# Altium PCB bruh.PcbDoc
Units mil, origin at the board's own origin, x right, y up, seen from the top; angles counter-clockwise.
Board outline 1870 x 2310 mil, 2 copper layers (Top Layer, Bottom Layer); 52 components, 49 nets, 251 pads, 36 vias.
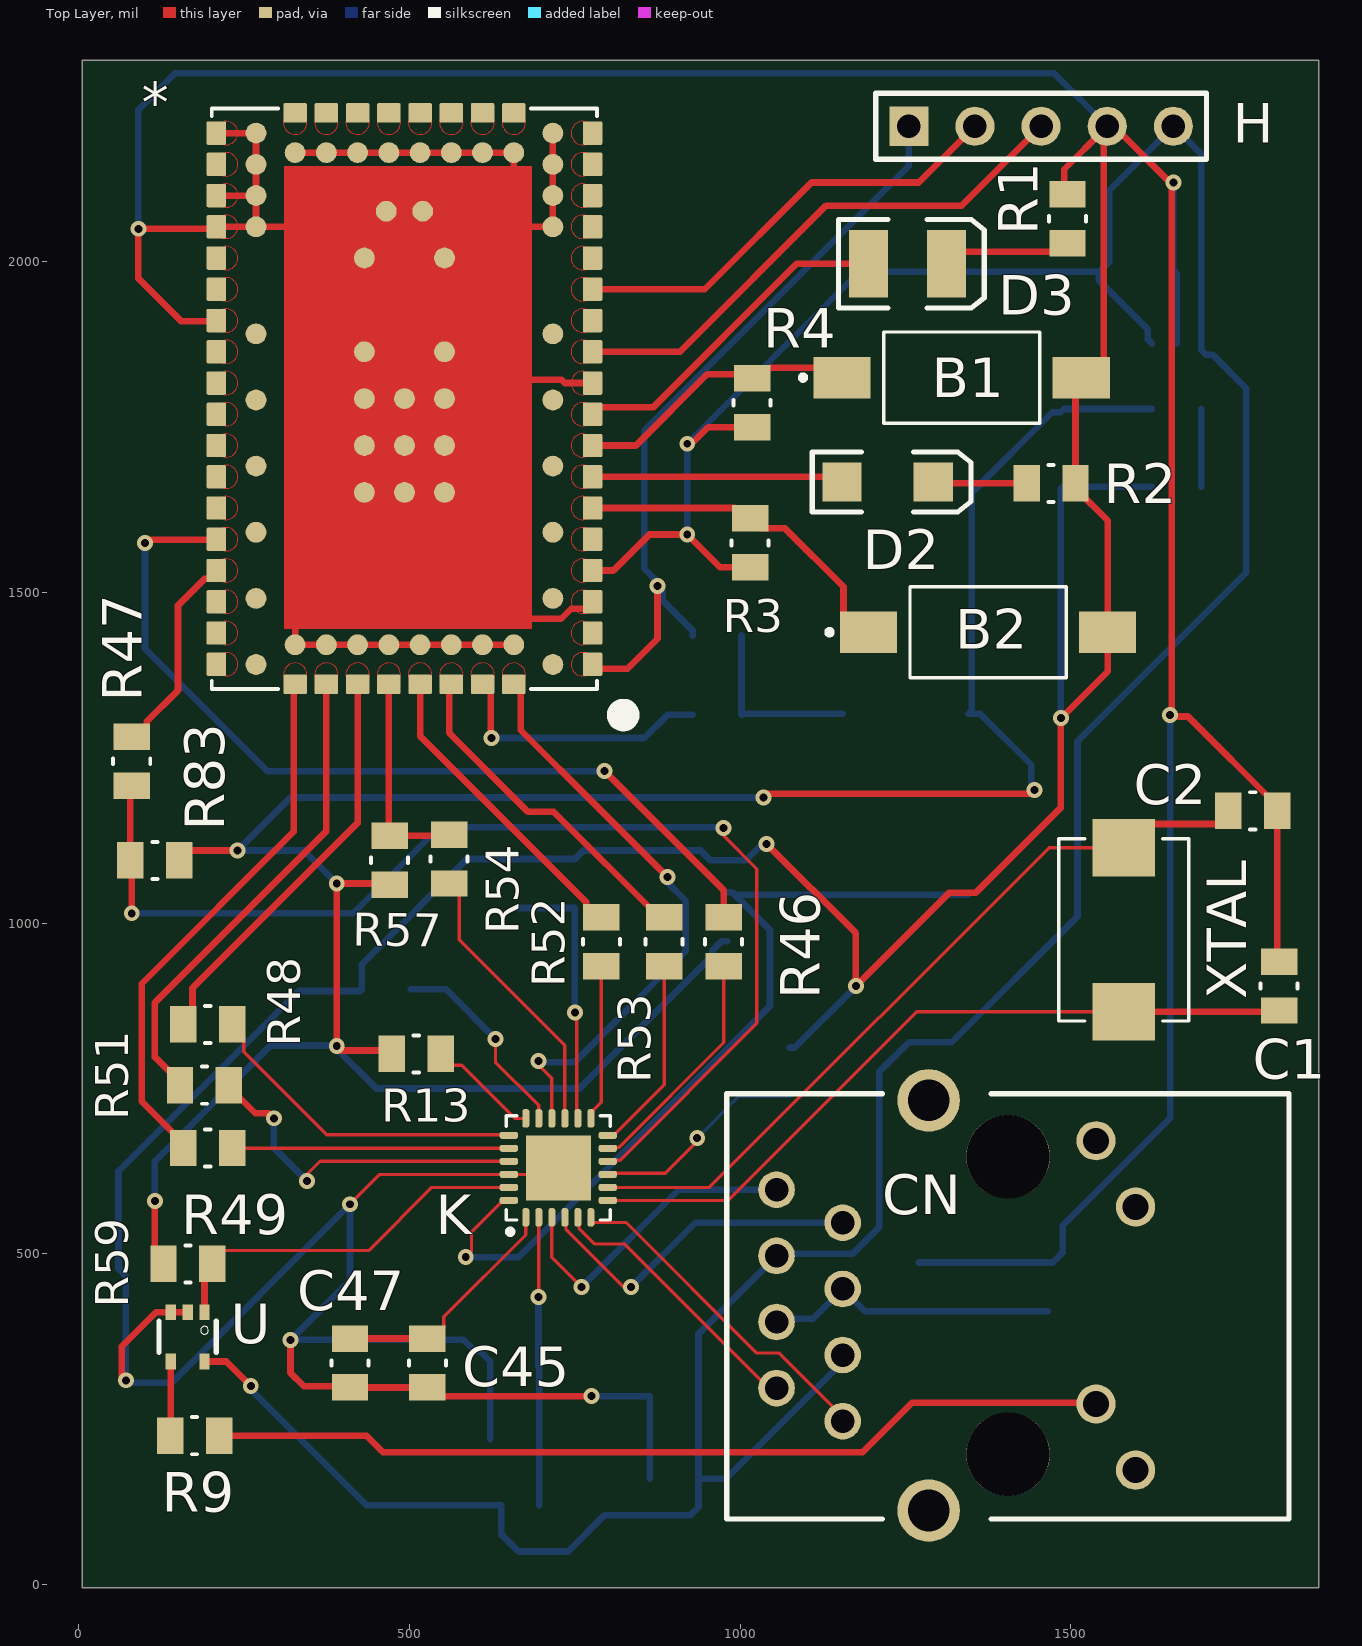
[diagram p0: Top Layer view]
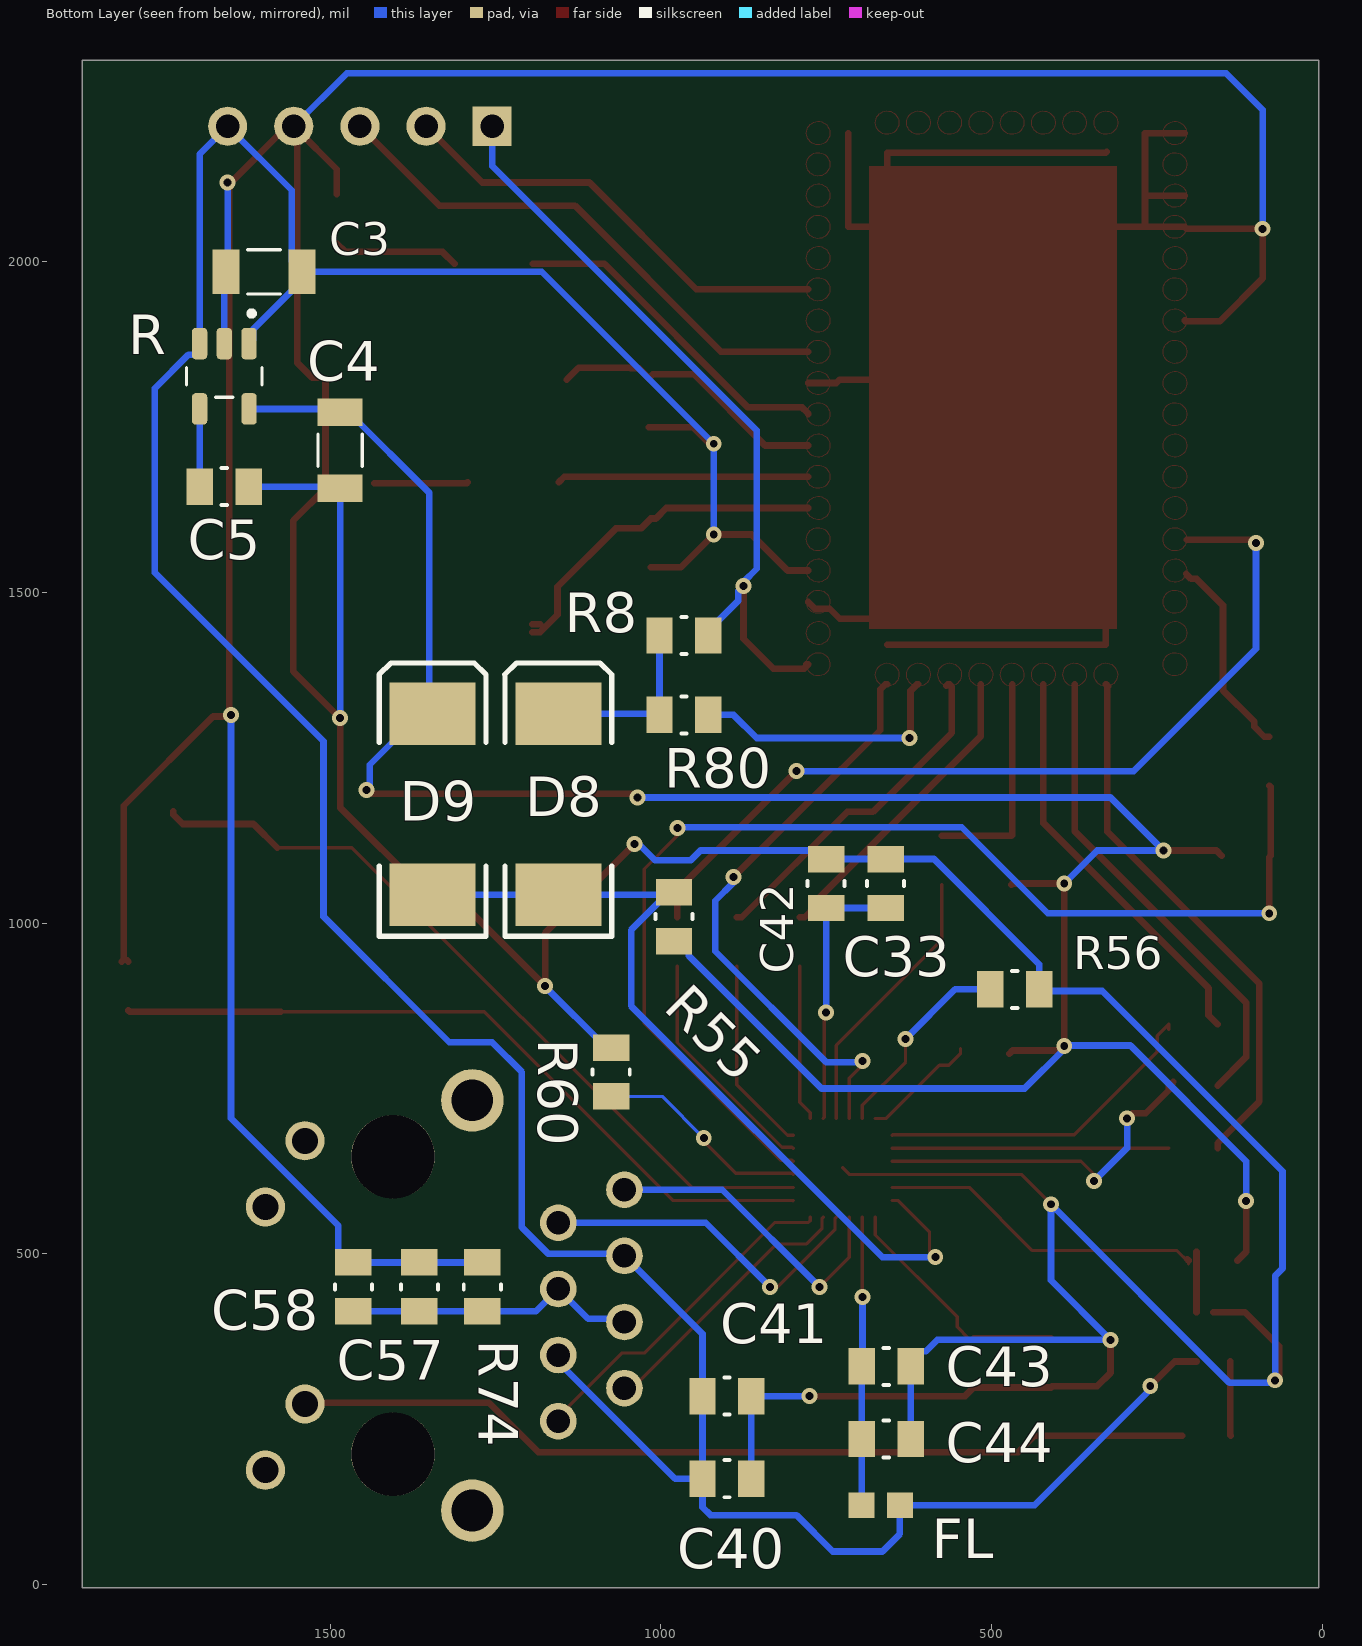
[diagram p1: Bottom Layer view, seen from below]

## Layer stack, top to bottom
Top Solder: solder mask 0.4, Solder Resist, Dk 3.5
Top Layer: signal copper 1.4
Dielectric 1: dielectric 12.6, FR-4, Dk 4.8
Bottom Layer: signal copper 1.4
Bottom Solder: solder mask 0.4, Solder Resist, Dk 3.5

## Board outline
5,2305 5,-5 1875,-5 1875,2305

## Design rules (kind name [scope] priority, off if disabled: settings)
Clearance [All] p1: gap=5 ignorepadtopadclearanceinfootprint=FALSE // Default=10mil
HoleSize [All] p1: absolutevalues=TRUE maxlimit=150 minlimit=1 maxpercent=80.000 minpercent=20.000 // MaximumDefault=100mil
MinimumSolderMaskSliver [All] p1: minsoldermaskwidth=1 // Default=10mil
PolygonConnect [All] p1: connectstyle=Relief reliefconductorwidth=10 reliefentries=4 polygonreliefangle="90 Angle" airgapwidth=10
RoutingVias [All] p1: holewidth=28 width=50 viastyle="Through Hole" minholewidth=28 minwidth=50 maxholewidth=28 maxwidth=50
SilkToSolderMaskClearance [IsPad] p1: minsilkscreentomaskgap=4 clearancetoexposedcopper=TRUE // Default=10mil
SolderMaskExpansion [All] p1: expansion=4 istentingtop=FALSE
Width [All] p1: maxlimit=10 minlimit=5 preferedwidth=10 minimp=50.000000 maximp=50.000000 favimp=50.000000 // MinWidthDefault=10mil
27 further rules are at their usual default settings.

## Classes and differential pairs
component class Ublox_breakout: * B1 B2 C1 C3 C4 C5 C33 C40 C42 C43 C44 C45 C47 C57 C58 CN D2 D3 D8 D9 FL H K R1 R2 R3 R4 R8 R9 R13 R46 R47 R48 R49 R51 R52 R53 R54 R55 R56 R57 R59 R60 R74 R80 R83 U XTAL

## Components (designator, comment, footprint, x,y, rotation, side; value= is the part's Value field where it differs from the comment)
* "ODIN-W262" ODIN-W262 492.37,1793.13 r90 top
B1 "push button" TECO-FSMSM 1335,1825 r0 top
B2 "push button" TECO-FSMSM 1375,1440 r0 top
C1 "22uF 10V" 0805 1815,905 r90 top value=22uF
C2 "22uF 10V" 0805 1775,1170 r0 top value=22uF
C3 "10UF 25V" 1206 1600,1985 r0 bottom value=10uF
C4 "10UF 25V" 1206 1485,1715 r270 bottom value=10uF
C5 "10nF 50V" 0805 1660,1660 r180 bottom value=10nF
C33 "2.2uF 16V" 0805 660,1060 r270 bottom value=2.2uF
C40 "100nF 50V" 0805 900,160 r0 bottom value=100nF
C41 "100nF 50V" 0805 900,285 r0 bottom value=100nF
C42 "100nF 50V" 0805 750,1060 r270 bottom value=100nF
C43 "2.2uF 16V" 0805 659,330 r0 bottom value=2.2uF
C44 "100nF 50V" 0805 659,220 r0 bottom value=100nF
C45 "100nF 50V" 0805 527,335 r90 top value=100nF
C47 "100nF 50V" 0805 410,335 r90 top value=100nF
C57 "100nF 50V" 0805 1365,450 r90 bottom value=100nF
C58 "100nF 50V" 0805 1465,450 r90 bottom value=100nF
CN "RJ45" *RJ45_PULSEJACK 1405,422 r270 top
D2 "LED2" 3.2X1.6X1.1 1223,1667 r0 top
D3 "LED3" 3.5X2.8X1.9 1253,1997 r0 top
D8 "Diode" SMC 1155,1180 r90 bottom
D9 "Diode" SMC 1345,1180 r90 bottom
FL "BLM18PG300SN1D" BEADC1608X95N 667.38,120 r0 bottom
H "Header 5" HDR1X5 1255,2205 r0 top
K "KSZ8081RNAIA-TR" QFN50P400X400X90-25N 725,630 r90 top
R "LP2992IM5-1.8" SOT95P280X145-5N 1660,1827 r270 bottom
R1 "270" 0805 1495,2065 r270 top
R2 "270" 0805 1470,1665 r180 top
R3 "1k" 0805 1015,1575 r270 top
R4 "1k" 0805 1018,1787 r270 top
R8 "JUMPER" 0805 965,1315 r180 bottom value=0
R9 "120" 0805 175,225 r180 top
R13 "1k" 0805 510,802.5 r180 top
R46 "10.0" 0805 975,972 r90 top
R47 "10.0" 0805 80,1245 r90 top
R48 "10.0" 0805 195,847 r0 top
R49 "10.0" 0805 195,660 r0 top
R51 "10.0" 0805 190,755 r0 top
R52 "10.0" 0805 790,972 r90 top
R53 "10.0" 0805 885,972 r90 top
R54 "10.0" 0805 560,1097 r90 top
R55 "1k" 0805 980,1010 r270 bottom
R56 "1k" 0805 465,900 r180 bottom
R57 "1k" 0805 470,1095 r90 top
R59 "1k" 0805 165,485 r0 top
R60 "6.8k" 0805 1075,775 r270 bottom
R74 "16m" 0805 1270,450 r270 bottom
R80 "JUMPER" 0805 965,1435 r180 bottom value=0
R83 "4.7k" 0805 115,1095 r180 top
U "NC7SZ125" SC70-5 164.41,374.6 r180 top
XTAL "CRYSTAL 25.0000MHZ 8PF SMD" SMD-2 1580,990 r270 top

## Footprints (in the part's own frame and the unit in brackets; to place one, negate y for a bottom-side part, rotate by r counter-clockwise, add the part's x,y. Pads: shape width x height; smd on the part's side, far side on the other; paste and mask are expansions set on the pad)
3.2X1.6X1.1 [mm]
  rect 1.5x1.5 smd: 1(-1.75,0) 2(1.75,0)
  silkscreen extent -2.9,-1.15 3.2,1.15
3.5X2.8X1.9 [mm] "SM LED; 2 C-Bend Leads; Body 3.5 x 2.8 x 1.9 mm, inc leads (LxWxH typ)"
  rect 1.5x2.6 smd: 1(-1.5,0) 2(1.5,0)
  silkscreen extent -2.65,-1.7 2.95,1.7
0805 [mil]
  rect 40x55 smd: 1(-37,0) 2(37,0)
  silkscreen extent -4,-28 4,28
1206 [mm]
  rect 1.05x1.72 smd: 1(-1.46,0) 2(1.46,0)
  silkscreen extent -0.62,-0.85 0.62,0.85
*RJ45_PULSEJACK [mm]
  round 1.408 hole 0.9: 1(4.445,-6.35) 2(3.175,-8.89) 3(1.905,-6.35) 4(0.635,-8.89) 5(-0.635,-6.35) 6(-1.905,-8.89) 7(-3.175,-6.35) 8(-4.445,-8.89)
  round 1.508 hole 1: 9(6.325,4.9) 10(3.785,3.38) 11(-3.785,4.9) 12(-6.325,3.38)
  round 3.2 hole 3.2 unplated: None(-5.715,0) None(5.715,0)
  round 2.4 hole 1.6: P$5(-7.875,-3.05) P$6(7.875,-3.05)
  silkscreen extent -8.13,-10.8 8.2,10.79
BEADC1608X95N [mm]
  rect 1x0.97 smd: 1(-0.735,0) 2(0.735,0)
HDR1X5 [mm] "Connector; Header; 5 Position"
  rect 1.5x1.5 hole 0.9: 1(0,0)
  round 1.5 hole 0.9: 2(2.54,0) 3(5.08,0) 4(7.62,0) 5(10.16,0)
  silkscreen extent -1.27,-1.27 11.43,1.27
ODIN-W262 [mm]
  round 0.8 smd: 1(6.6,-5.7) 2(7.8,-5.7) 3(9,-5.7) 4(10.2,-5.7) 5(9.45,-4.2) 6(9.45,-3) 7(9.45,-1.8) 8(9.45,-0.6) 9(9.45,0.6) 10(9.45,1.8) 11(9.45,3) 12(9.45,4.2) 13(10.2,5.7) 14(9,5.7) 15(7.8,5.7) 16(6.6,5.7) 17(-9.45,4.2) 18(-9.45,3) 19(-9.45,1.8) 20(-9.45,0.6) 21(-9.45,-0.6) 22(-9.45,-1.8) 23(-9.45,-3) 24(-9.45,-4.2) 25(-3.6,-1.54) 26(-1.8,-1.54) 27(0,-1.54) 28(1.8,-1.54) 29(5.4,-1.54) 30(7.2,-0.7) 31(-3.6,0) 32(-1.8,0) 33(0,0) 34(-3.6,1.54) 35(-1.8,1.54) 36(0,1.54) 37(1.8,1.54) 38(5.4,1.54) 39(7.2,0.7) TP1(2.49,-5.7) TP2(2.49,5.7) TP3(-0.05,-5.7) TP4(-0.05,5.7) TP5(-2.59,-5.7) TP6(-2.59,5.7) TP7(-5.13,-5.7) TP8(-5.13,5.7) TP9(-7.67,-5.7) TP10(-7.67,5.7) TP11(-10.21,-5.7) TP12(-10.21,5.7)
  rrect15% 0.9x0.75 smd paste-1 mask+0: A1(-10.2,-7.225) A2(-9,-7.225) A3(-7.8,-7.225) A4(-6.6,-7.225) A5(-5.4,-7.225) A6(-4.2,-7.225) A7(-3,-7.225) A8(-1.8,-7.225) A9(-0.6,-7.225) A10(0.6,-7.225) A11(1.8,-7.225) A12(3,-7.225) A13(4.2,-7.225) A14(5.4,-7.225) A15(6.6,-7.225) A16(7.8,-7.225) A17(9,-7.225) A18(10.2,-7.225) C1(10.2,7.225) C2(9,7.225) C3(7.8,7.225) C4(6.6,7.225) C5(5.4,7.225) C6(4.2,7.225) C7(3,7.225) C8(1.8,7.225) C9(0.6,7.225) C10(-0.6,7.225) C11(-1.8,7.225) C12(-3,7.225) C13(-4.2,7.225) C14(-5.4,7.225) C15(-6.6,7.225) C16(-7.8,7.225) C17(-9,7.225) C18(-10.2,7.225)
  rrect15% 0.75x0.9 smd paste-1 mask+0: B1(10.975,-4.2) B2(10.975,-3) B3(10.975,-1.8) B4(10.975,-0.6) B5(10.975,0.6) B6(10.975,1.8) B7(10.975,3) B8(10.975,4.2) D1(-10.975,4.2) D2(-10.975,3) D3(-10.975,1.8) D4(-10.975,0.6) D5(-10.975,-0.6) D6(-10.975,-1.8) D7(-10.975,-3) D8(-10.975,-4.2)
  Top Layer circle w0: c-6.6,-6.85 r0.45
  Top Layer circle w0: c10.2,6.85 r0.45
  Top Layer circle w0: c7.8,6.85 r0.45
  Top Layer circle w0: c3,-6.85 r0.45
  Top Layer circle w0: c5.4,-6.85 r0.45
  Top Layer circle w0: c6.6,-6.85 r0.45
  Top Layer circle w0: c7.8,-6.85 r0.45
  Top Layer circle w0: c9,-6.85 r0.45
  Top Layer circle w0: c10.2,-6.85 r0.45
  Top Layer circle w0: c-9,-6.85 r0.45
  Top Layer circle w0: c-5.4,-6.85 r0.45
  Top Layer circle w0: c1.8,6.85 r0.45
  Top Layer circle w0: c0.6,6.85 r0.45
  Top Layer circle w0: c-0.6,6.85 r0.45
  Top Layer circle w0: c-1.8,6.85 r0.45
  Top Layer circle w0: c-3,6.85 r0.45
  Top Layer circle w0: c-4.2,6.85 r0.45
  Top Layer circle w0: c-7.8,6.85 r0.45
  Top Layer circle w0: c-9,6.85 r0.45
  Top Layer circle w0: c-10.2,6.85 r0.45
  Top Layer circle w0: c9,6.85 r0.45
  Top Layer circle w0: c5.4,6.85 r0.45
  Top Layer circle w0: c4.2,6.85 r0.45
  Top Layer circle w0: c10.6,-4.2 r0.45
  Top Layer circle w0: c10.6,-3 r0.45
  Top Layer circle w0: c10.6,-1.8 r0.45
  Top Layer circle w0: c10.6,-0.6 r0.45
  Top Layer circle w0: c10.6,0.6 r0.45
  Top Layer circle w0: c10.6,1.8 r0.45
  Top Layer circle w0: c10.6,3 r0.45
  Top Layer circle w0: c10.6,4.2 r0.45
  Top Layer circle w0: c-3,-6.85 r0.45
  Top Layer circle w0: c-4.2,-6.85 r0.45
  Top Layer circle w0: c-1.8,-6.85 r0.45
  Top Layer circle w0: c4.2,-6.85 r0.45
  Top Layer circle w0: c1.8,-6.85 r0.45
  Top Layer lines w0: -5.414,7.3 ccw(c-5.4,6.85) -5.667,6.488 ccw(c-5.4,6.85) -5.4,6.4 ccw(c-5.4,6.85) -5.414,7.3 ; 2.968,7.299 cw(c3,6.85) 3,6.4 cw(c3,6.85) 2.968,7.299 ; 6.53,7.295 cw(c6.6,6.85) 6.6,6.4 cw(c6.6,6.85) 6.53,7.295 ; -6.731,7.281 cw(c-6.6,6.85) -6.6,6.4 cw(c-6.6,6.85) -6.731,7.281 ; -11.042,4.286 cw(c-10.6,4.2) -10.6,3.75 cw(c-10.6,4.2) -11.042,4.286 ; -11.05,3 ccw(c-10.6,3) -10.6,2.55 ccw(c-10.6,3) -11.05,3 ; -11.05,1.8 cw(c-10.6,1.8) -10.6,1.35 cw(c-10.6,1.8) -11.05,1.8 ; -11.05,0.6 ccw(c-10.6,0.6) -10.6,0.15 ccw(c-10.6,0.6) -11.05,0.6 ; -11.05,-0.6 cw(c-10.6,-0.6) -10.6,-1.05 cw(c-10.6,-0.6) -11.05,-0.6 ; -11.031,-1.931 cw(c-10.6,-1.8) -10.6,-2.25 cw(c-10.6,-1.8) -11.031,-1.931 ; -11.042,-3.086 cw(c-10.6,-3) -10.6,-3.45 cw(c-10.6,-3) -11.042,-3.086 ; -11.031,-4.331 cw(c-10.6,-4.2) -10.6,-4.65 cw(c-10.6,-4.2) -11.031,-4.331 ; 0.6,-6.4 cw(c0.6,-6.85) 0.6,-7.3 cw(c0.6,-6.85) 0.6,-6.4 ; -8.067,-6.488 cw(c-7.8,-6.85) -7.8,-7.3 cw(c-7.8,-6.85) -8.067,-6.488 ; -10.069,-7.281 cw(c-10.2,-6.85) -10.114,-7.292 cw(c-10.2,-6.85) -10.2,-7.3 cw(c-10.2,-6.85) -10.069,-7.281 ; -0.514,-7.292 cw(c-0.6,-6.85) -0.6,-7.3 cw(c-0.6,-6.85) -0.514,-7.292
  silkscreen extent -12.4,-8.65 11.15,7.4, body extent -11.15,-7.4 11.15,7.4, height 4.8
QFN50P400X400X90-25N [mm]
  rrect70% 0.71x0.27 smd: 1(-1.9,1.25) 2(-1.9,0.75) 3(-1.9,0.25) 4(-1.9,-0.25) 5(-1.9,-0.75) 6(-1.9,-1.25) 13(1.9,-1.25) 14(1.9,-0.75) 15(1.9,-0.25) 16(1.9,0.25) 17(1.9,0.75) 18(1.9,1.25)
  rrect70% 0.27x0.71 smd: 7(-1.25,-1.9) 8(-0.75,-1.9) 9(-0.25,-1.9) 10(0.25,-1.9) 11(0.75,-1.9) 12(1.25,-1.9) 19(1.25,1.9) 20(0.75,1.9) 21(0.25,1.9) 22(-0.25,1.9) 23(-0.75,1.9) 24(-1.25,1.9)
  rect 2.5x2.5 smd paste-2: 25(0,0)
  silkscreen extent -2.55,-2 2,2
SC70-5 [mm]
  rect 0.4x0.6 smd: 1(-0.65,-0.95) 2(0,-0.95) 3(0.65,-0.95) 4(0.65,0.95) 5(-0.65,0.95)
  silkscreen extent -1.1,-0.6 1.1,0.6
SMC [mm] "DO-214-AB/SMC; 2 C-Bend Leads; Body 7.9 x 5.9 mm, inc. leads (LxW)"
  rect 2.4x3.3 smd: 1(-3.475,0) 2(3.475,0)
  silkscreen extent -5.07,-2.05 5.43,2.05
SMD-2 [mm]
  rect 2.2x2.4 smd: 1(-3.15,0) 2(3.15,0)
  silkscreen extent -3.5,-2.5 3.5,2.5
SOT95P280X145-5N [mm]
  rrect50% 1.21x0.59 smd: 1(-1.255,0.95) 2(-1.255,0) 3(-1.255,-0.95) 4(1.255,-0.95) 5(1.255,0.95)
  silkscreen extent -2.51,-1.45 0.8,1.45
TECO-FSMSM [mm]
  rect 2.19x1.6 smd: 1(-4.59,0) 2(4.59,0)
  silkscreen extent -6.2,-1.75 3,1.75

## Part data
B1 B2: library part Teco-FSMSM
C1 C2: library part "CAP 22uF 10V", "CAP CER 2.2UF 10V X5R 0805", Operating Temperature="-55°C ~ 85°C", Package=0805, Rating=10V, Temperature Coefficient=X5R, Tolerance=20%
C3 C4: library part "CAP 10uF 25V", "CAP CER 10UF 25V X5R 1206", Operating Temperature="-55°C ~ 85°C", Package=1206, Rating=25V, Temperature Coefficient=X5R, Tolerance=10%
C5: library part "CAP 10nF 50V", "CAP CER 10000PF 50V X7R 0805", Operating Temperature="-55°C ~ 125°C", Package=0805, Rating=50V, Temperature Coefficient=X7R, Tolerance=10%
C33 C43: library part "CAP 2.2uF 16V", "CAP CER 2.2UF 16V X7R 0805", Operating Temperature="-55°C ~ 125°C", Package=0805, Rating=16V, Temperature Coefficient=X7R, Tolerance=10%
C40 C41 C42 C44 C45 C47 C57 C58: library part "CAP 100nF 50V", "CAP CER 0.1UF 50V X7R 0805", Package=0805, Rating=50V, Tolerance=10%
CN: "Jack Modular Connector 8p8c (RJ45, Ethernet) 90Â° Angle (Right) Unshielded", Package=None, Availability=Unavailable, Check_prices=https://www.snapeda.com/parts/RJ45/Bulgin/view-part/55901/?ref=eda, MF=Bulgin, MP=RJ45, Price=None, SnapEDA_Link=https://www.snapeda.com/parts/RJ45/Bulgin/view-part/55901/?ref=snap
D2: library part "LED RED SMD", "Typical RED, GREEN, YELLOW, AMBER GaAs LED", Color=Red, Current - Test=20mA, Lens Color=Colorless, Package=1206, Voltage - Forward (Vf) (Typ)=1.7V, Lens Transparency=Clear
D3: "Typical BLUE SiC LED", DatasheetVersion=16-Apr-2002, LatestRevisionDate=17-Dec-2003, LatestRevisionNote="PCB Footprint replaced.", PackageDescription="SM LED; 2 C-Bend Leads; Body 3.5 x 2.8 x 1.9 mm, inc leads (LxWxH typ)", PackageReference=3.5X2.8X1.9, PackageVersion=16-Apr-2002, Published=8-Jun-2000, Publisher="Altium Limited"
D8 D9: "Default Diode", Code_JEDEC=DO-214-AB, LatestRevisionDate=17-Jul-2002, LatestRevisionNote="Re-released for DXP Platform.", PackageDescription="DO-214-AB/SMC; 2 C-Bend Leads; Body 7.9 x 5.9 mm, inc. leads (LxW)", PackageReference=SMC, PackageVersion=Sep-1996, Published=8-Jun-2000, Publisher="Altium Limited"
FL: "30 Ohms @ 100MHz 1 Power Line Ferrite Bead 0603 _1608 Metric_ 1A 50mOhm", Package="1608 Murata", Availability=Unavailable, MF=Murata, MP=BLM18PG300SN1D, Price=None, SnapEDA_Link=https://www.snapeda.com/parts/BLM18PG300SN1D/Murata/view-part/270173/?ref=snap
H: "Header, 5-Pin", LatestRevisionDate=17-Jul-2002, LatestRevisionNote="Re-released for DXP Platform.", Publisher="Altium Limited"
K: "1/1 Transceiver Full RMII 24-QFN _4x4_", Package="QFN-24 Microchip", Availability=Unavailable, MF=Microchip, MP=KSZ8081RNAIA-TR, Price=None, SnapEDA_Link=https://www.snapeda.com/parts/KSZ8081RNAIA-TR/Microchip/view-part/482545/?ref=snap
R: Package=None, Availability=Unavailable, MP=LP2992IM5-1.8/NOPB, Price=None
R1 R2: library part "RES 270 1/8W", "RES SMD 270 OHM 5% 1/8W 0805", Package=0805, Power (Watts)=0.125W, Tolerance=5%
R3 R4 R13 R55 R56 R57 R59: library part "RES 1k 1/8W", "RES SMD 1K OHM 5% 1/8W 0805", Package=0805, Power (Watts)=0.125W, Tolerance=5%
R8 R80: library part "RES 0 JUMPER", "RES SMD 0 OHM JUMPER GENERIC 0805", Package=0805
R9: library part "RES 120.0 1/8W", "RES SMD 120 OHM 5% 1/8W 0805", Package=0805, Power (Watts)=0.125W, Tolerance=5%
R46 R47 R48 R49 R51 R52 R53 R54: library part "RES 10.0 1/8W - 5%", "RES SMD 10.0 OHM 5% 1/8W 0805", Package=0805, Power (Watts)=0.125W, Tolerance=5%
R60: library part "RES 6.8k 1/8W", "RES SMD 6.8K OHM 5% 1/8W 0805", Package=0805, Power (Watts)=0.125W, Tolerance=5%
R74: library part "RES 16m 1/2W", "RES SMD 0.016 OHM 1% 1/2W 0805 Thick Film", Case Code (Imperial)=0805, Case Code (Metric)=2012, Manufacturer=Panasonic, Manufacturer Part Number=ERJ-6BWFR016V, Max Operating Temperature=155°C, Max Power Dissipation=500mW, Min Operating Temperature=-55°C, Package Quantity=1, Resistance=16mR, Supplier Part Number 1=P.016AQCT-ND, Temperature Coefficient=200ppm/°C, Tolerance=1%, Case/Package=0805, Category="Chip SMD Resistors", ComponentLink1Description=https://datasheet.ciiva.com/11808/0900766b8126441d-11808690.pdf?src-supplier=RSComponents, ComponentLink1URL=https://datasheet.ciiva.com/11808/0900766b8126441d-11808690.pdf?src-supplier=RSComponents, ComponentLink2Description=https://datasheet.ciiva.com/2452/aoa0000ce3-2452594.pdf?src-supplier=Digi-Key, ComponentLink2URL=https://datasheet.ciiva.com/2452/aoa0000ce3-2452594.pdf?src-supplier=Digi-Key, ComponentLink3Description=https://datasheet.ciiva.com/2452/aoa0000ce3-2452592.pdf?src-supplier=Digi-Key, ComponentLink3URL=https://datasheet.ciiva.com/2452/aoa0000ce3-2452592.pdf?src-supplier=Digi-Key, ComponentLink4Description=https://datasheet.ciiva.com/2452/aoa0000ce3-2452593.pdf?src-supplier=Digi-Key, ComponentLink4URL=https://datasheet.ciiva.com/2452/aoa0000ce3-2452593.pdf?src-supplier=Digi-Key, ComponentLink5Description=https://datasheet.ciiva.com/9192/aoa0000ce3-9192761.pdf?src-supplier=Avnet, ComponentLink5URL=https://datasheet.ciiva.com/9192/aoa0000ce3-9192761.pdf?src-supplier=Avnet, ComponentLink6Description=https://datasheet.ciiva.com/17211/aoa0000ce3-17211370.pdf?src-supplier=Avnet+Europe, ComponentLink6URL=https://datasheet.ciiva.com/17211/aoa0000ce3-17211370.pdf?src-supplier=Avnet+Europe, Composition="Thick Film", Contact Plating=Tin, Depth=1.25mm, Features="Automotive AEC-Q200", Height=0.028inch, Lead Free="Lead Free", Length=2mm, Military Standard=Not, Mount="Surface Mount", Number of Pins=2, Number of Terminations=2, Packaging="Tape and Reel", Power Rating=500mW, Pricing 1="1=0.65000, 10=0.53800, 100=0.36140, 1000=0.21148, 2500=0.20917 (USD)", Radiation Hardening=No, RoHS=Yes, Stock 1=4585, Supplier 1=Digi-Key, Termination=SMD/SMT, Width=0.049inch
R83: library part "RES 4.7k 1/8W - 5%", "RES SMD 4.7k OHM 5% 1/8W 0805", Package=0805, Power (Watts)=0.125W, Tolerance=5%
U: "Buffer, Non-Inverting 1 Element 1 Bit per Element 3-State Output SC-70-5", Package="SC-70 ON Semiconductor", Availability=Unavailable, MF="ON Semiconductor", MP=NC7SZ125, Price=None, SnapEDA_Link=https://www.snapeda.com/parts/NC7SZ125/ON%20Semiconductor/view-part/2686816/?ref=snap
XTAL: library part "XTAL 25MHZ 8PF SMD", "25MHz ±50ppm Crystal 8pF 70 Ohms 2-SMD, No Lead", Frequency=25MHz, Load Capacitance=8pF, Package="2-SMD, No Lead", Supplier Part Number 1=644-1041-1-ND, Digikey=644-1041-1-ND, Digikey Link=https://www.digikey.ca/product-detail/en/ndk-america-inc/NX5032GA-25.000000MHZ-LN-CD-1/644-1041-1-ND/1128913, ESR="70 Ohms", MF="NDK America, Inc.", MP=NX5032GA-25.000000MHZ-LN-CD-1, Price="0.95 CAD", Supplier 1=Digi-Key

## Via types
v1: diameter 24, hole 12, Top Layer to Bottom Layer, 36 vias

## Nets (pads, with @x,y where several pads share a name; then routed paths per layer and width w, separated by ;. In a path a pad name is that pad's centre, name@x,y a point inside that pad or via, vN(x,y) a via of type N, cw(c..) or ccw(c..) an arc to the next point about the centre after c; other vN are vias at no path point)
1v8: C4.1 D9.2 R13.2 R55.2 R57.1 R59.1 R83.1 R.5 | length 3966.8
  Top Layer w10: v1(115,580) 115,503 R59.1@128,490 ; R83.1@152,1102 160,1110 v1(240,1110) ; R57.1 468,1060 v1(390,1060) v1(390,814.38) 396.88,807.5 468,807.5 R13.2 ; v1(1035,1190) 1040.62,1195.62 1439.38,1195.62 v1(1445,1201.25)
  Bottom Layer w10: v1(115,580) 115,640 290,815 389.38,815 v1(390,814.38) 390,810 450,750 757,750 957.5,950.5 957.5,958 972.5,973 R55.2 ; v1(390,1060) 340,1110 v1(240,1110) 320,1190 v1(1035,1190) ; v1(1445,1201.25) 1440,1206.25 1440,1239.53 1362.72,1316.81 D9.2 1350,1321.81 1350,1650.67 1471.81,1772.48 C4.1 1490.11,1777.59 R.5
3v3: *.A4 C3.1 C40.2 C41.2 CN.3 CN.6 FL.1 H.5 R3.2 R4.2 R.1 R.3 U.5 | length 5475.1
  Top Layer w10: U.5 222.8,337.2 v1(260,300) ; *.A4 779.77,1533.29 808.29,1533.29 862.78,1587.78 v1(920,1587.78) 969.78,1538 R3.2 ; v1(920,1725) 926.57,1725 951.57,1750 R4.2
  Bottom Layer w10: v1(260,300) 260,295 435,120 FL.1 638.44,76.56 665,50 740,50 795,105 925,105 937,117 C40.2 ; v1(920,1587.78) v1(920,1725) 1180,1985 C3.1 ; CN.3 1155,336.59 978.41,160 C40.2 ; R.1 1616.48,1882.53 1616.48,1897.85 1542.52,1971.81 C3.1 ; C40.2 C41.2 937,379 CN.6 1058,500 1170,500 1210,540 1210,774.77 1255.11,819.89 1319.89,819.89 1510,1010 1510,1275 1765,1530 1765,1808.81 1714.02,1859.79 1703.95,1859.79 1697.4,1866.34 R.3 1697.4,2162.6 H.5 1558.19,2108.19 1558.19,2000.67 C3.1
BlueLED: *.A9 D3.1 | length 511.8
  Top Layer w10: *.A9 776.82,1770.25 779.45,1772.88 786.58,1780.01 868.4,1780.01 1085.39,1997 D3.1
ETH_CRSDV: *.D4 R54.2 R57.2 | length 334.6
  Top Layer w10: *.D4 468.75,1358.09 468.75,1133.25 R57.2 R54.2@575,1132
ETH_MC: K.10 R47.1 R83.2 | length 1771.8
  Top Layer w5: K.10 801.67,641.71 818.31,641.71 1025,848.41 1025,1081.97 975,1131.97 v1(975,1143.91)
  Top Layer w10: v1(80,1015) 80,1100 78,1102 78,1206 R47.1
  Bottom Layer w10: v1(80,1015) 415,1015 545,1145 973.91,1145 v1(975,1143.91)
ETH_MDIO: K.11 R46.1 | length 356.9
  Top Layer w5: K.11 801.67,661.4 816.78,661.4 975,819.62 R46.1
ETH_REFCLK: *.D8 K.16 | length 900.6
  Top Layer w5: v1(695,791.53) 695,785.88 715.16,765.73 K.16
  Top Layer w10: *.D8 660.68,1361.05 662.87,1358.86 668.23,1353.5 668.23,1291.77 782.79,1177.21 v1(890,1070)
  Bottom Layer w10: v1(695,791.53) 696.53,790 750,790 917.63,957.63 917.63,1033.99 890,1061.62 v1(890,1070)
ETH_RXD0: *.D5 R52.2 | length 469.9
  Top Layer w10: *.D5 515.99,1358.09 515.99,1283.01 767.5,1031.5 767.5,1024 782.5,1009 R52.2
ETH_RXD1: *.D6 R53.2 | length 521.1
  Top Layer w10: *.D6@568.38,1358.86 566.19,1361.05 *.D6 560,1357.81 560,1287.76 679.38,1168.38 718.12,1168.38 877.5,1009 R53.2
ETH_TXD0: *.D1 R49.1 | length 827.7
  Top Layer w10: R49.1 158,667.5 95,730.5 95,908.43 325,1138.43 325,1359.03 *.D1 326.28,1361.05 *.D1@323.65,1358.42
ETH_TXD1: *.D2 R51.1 | length 731.7
  Top Layer w10: R51.1@158,754.5 115,797.5 115,880 374.26,1139.26 374.26,1358.09 *.D2
ETH_TXEN: *.D3 R48.1 | length 623.2
  Top Layer w10: R48.1 171.86,860.86 171.86,901.86 421.5,1151.5 421.5,1358.09 *.D3
GND: *.1 *.2 *.3 *.4 *.5 *.6 *.7 *.8 *.9 *.10 *.11 *.12 *.13 *.14 *.15 *.16 *.17 *.18 *.19 *.20 *.21 *.22 *.23 *.24 *.25 *.26 *.27 *.28 *.29 *.30 *.31 *.32 *.33 *.34 *.35 *.36 *.37 *.38 *.39 *.A3 *.A10 *.C1 *.C3 *.C4 *.C7 B1.2 B2.2 C1.2 C2.2 C3.2 C4.2 C5.2 C33.1 C40.1 C41.1 C42.1 C43.1 C44.1 C45.1 C47.1 C57.2 C58.2 H.4 K.22 K.25 R1.1 R2.1 R56.2 R60.1 R74.1 R.2 U.2 U.3 | length 13102.3
  Top Layer w5: v1(410,575) 455.16,620.16 K.22 715.16,620.16 K.25
  Top Layer w10: v1(71.17,308.83) 65,315 65,360 117,412 U.3 U.2 ; *.C7 206.68,1910 205.01,1910 155,1910 90,1975 v1(90,2050) 204.94,2050 205.18,2050.24 *.C4 240.4,2052.98 *.16 ; *.C3 240.4,2100.22 *.15 ; *.C1 240.4,2194.71 *.13 *.14 *.15 ; v1(320,370) 320,320 340,300 408,300 C47.1 C45.1 540,285 v1(775,285) ; 325,1460 327.02,1457.98 *.17 *.18 *.19 *.20 *.21 *.22 *.23 *.24 ; *.12@325.8,2166.4 *.12 *.11 *.10 *.9 *.8 *.7 *.6 *.5 657.72,2050 ; 330,2055 327.98,2052.98 *.16 ; 670,1455 675.42,1460.42 729.52,1460.42 744.64,1475.55 747.79,1475.55 767.06,1475.55 776.82,1485.31 *.A3 ; *.4 *.3 *.2 *.1 660.7,2052.98 657.72,2050 ; *.A10 744.34,1816.76 734.67,1816.76 729.52,1821.91 680,1821.91 675,1826.91 675,1835 657.72,1852.28 657.72,2050 ; v1(1040,1120) 1175,985 v1(1175,905) 1316.33,1046.33 1356.33,1046.33 1485,1175 v1(1485,1310) 1555.71,1380.71 B2.2 1555.71,1608.79 1507,1657.5 R2.1 B1.2@1507,1818.71 ; R1.1@1490,2102 1490,2140 H.4@1550,2200 ; B1.2 1527.32,1825 1550,1847.68 H.4@1550,2200 ; C1.2@1805,942 C1.2@1807,944 ; C1.2 1812,945 C2.2 1812,1177.5 1677,1312.5 1652.5,1312.5 v1(1650,1315) 1652.5,1317.5 1652.5,2117.5 v1(1655,2120) 1650,2120 1565,2205 H.4 H.4@1550,2200 ; *.16 *.15
  Bottom Layer w10: v1(90,2050) 90,2230 145,2285 1475,2285 H.4 ; C44.1 C43.1 622,337.5 607,352.5 599.5,352.5 582,370 v1(320,370) 410,460 v1(410,575) 140,305 75,305 v1(71.17,308.83) 71.17,466.74 60,477.91 60,625 332.5,897.5 425.5,897.5 R56.2 428,938 587,1097 C33.1 C42.1 763,1110 940,1110 955,1095 1008.43,1095 1033.43,1120 v1(1040,1120) ; v1(775,285) C41.1 C40.1 ; R60.1 1082.5,812 1175,904.5 v1(1175,905) ; R74.1 C57.2 C58.2 1472.5,487 1487.5,502 1487.5,542.5 1650,705 v1(1650,1315) ; v1(1485,1310) C4.2 1487.48,1660 C5.2 ; v1(1655,2120) 1655,1987.48 C3.2 1660,1982.48 R.2
INV_TO_RJ45: CN.10 R9.1 | length 1368.3
  Top Layer w10: R9.1 435,225 460,200 1185,200 1259.99,274.99 1536.06,274.99 CN.10
KSZ_RST_OUT: D8.1 D9.1 K.24 R55.1 | length 1292.3
  Top Layer w5: v1(585,495) 593.61,503.61 593.61,532.86 641.54,580.79 K.24
  Bottom Layer w10: v1(585,495) 665,495 1045,875 1045,989.5 R55.1@991.31,1043.19 ; R55.1 987.5,1047 R55.1@991.31,1043.19 ; D9.1 D8.1 R55.1@991.31,1043.19
MAIN_RESET: *.A1 H.1 R80.2 | length 1168.4
  Top Layer w10: *.A1@779.77,1391.56 *.A1 783.38,1385 830,1385 875,1430 v1(875,1510)
  Bottom Layer w10: R80.2 928,1442.5 882.65,1487.85 882.65,1502.35 v1(875,1510) 875,1515.86 855,1535.86 855,1745 1255,2145 H.1
Net*_D7: *.D7 R8.2 | length 406.3
  Top Layer w10: *.D7 612.79,1361.05 622.56,1351.28 622.56,1281.78 v1(624.13,1280.2)
  Bottom Layer w10: v1(624.13,1280.2) 624.33,1280 855,1280 890,1315 R8.2
NetC5_1: C5.1 R.4 | length 117.8
  Bottom Layer w10: C5.1 1697.4,1660.4 R.4
NetC33_2: C33.2 C42.2 K.14 | length 410.1
  Top Layer w5: v1(750,865) 752.66,862.34 752.66,706.67 K.14
  Bottom Layer w10: C33.2 C42.2 v1(750,865)
NetD2_2: D2.2 R2.2 | length 141.9
  Top Layer w10: D2.2 1293.9,1665 R2.2
NetD3_2: D3.2 R1.2 | length 190.8
  Top Layer w10: D3.2 1330.06,2015 1477,2015 R1.2@1490,2028
NetD8_2: D8.2 R8.1 R80.1 | length 273.8
  Bottom Layer w10: R80.1 R8.1 1003.81,1316.81 D8.2
NetK_9: K.9 R60.2 | length 326.9
  Top Layer w5: K.9 801.67,622.03 887.03,622.03 935,670 v1(935,675)
  Bottom Layer w5: v1(935,675) 998,738 R60.2
NetK_12: K.12 R53.1 | length 296.2
  Top Layer w5: K.12 808.46,679.21 885,755.75 R53.1
NetK_13: K.13 R52.1 | length 236.7
  Top Layer w5: K.13 774.21,713.46 790,729.25 R52.1
NetK_15: K.15 R54.1 | length 419.4
  Top Layer w5: R54.1@575,1058 575,975 734.84,815.16 K.15
NetK_17: K.17 R56.1 | length 306.4
  Top Layer w5: v1(630,825) 630,790 695.47,724.53 K.17
  Bottom Layer w10: R56.1 555,900 v1(630,825)
NetK_18: K.18 R13.1 | length 176.8
  Top Layer w5: R13.1@547,810 R13.1 564.5,785 578.68,785 658.88,704.8 K.18
NetK_19: K.19 R48.2 | length 509.3
  Top Layer w5: R48.2@232,839.5 R48.2 249.5,829.5 249.5,805.5 375,680 649.41,680 K.19
NetK_20: K.20 R49.2 | length 418.4
  Top Layer w5: R49.2 232.47,659.53 K.20
NetK_21: K.21 R51.2 | length 535.2
  Top Layer w5: v1(345,610) 345,620.19 364.66,639.84 K.21
  Top Layer w10: R51.2@225,760 232,753 232,747.5 266.85,712.65 287.35,712.65 v1(295,705)
  Bottom Layer w10: v1(295,705) 295,660 v1(345,610)
NetR9_2: R9.2 U.4 | length 113.7
  Top Layer w5: U.4@138,336.38 U.4
  Top Layer w10: R9.2 138.82,225.82 U.4
PHY_LED0: K.23 R59.2 U.1 | length 591.3
  Top Layer w5: R59.2 202,487.5 219.5,505 438.03,505 533.51,600.47 K.23
  Top Layer w10: U.1 R59.2@190,503 ; R59.2@202,490 R59.2@204,492
PHY_RXN: CN.8 K.3 | length 479.7
  Top Layer w5: K.3 715.16,494.84 v1(760,450)
  Bottom Layer w10: v1(760,450) 907,597 CN.8
PHY_RXP: CN.7 K.4 | length 513.7
  Top Layer w5: K.4 736.71,553.33 736.71,536.69 823.41,450 v1(835,450)
  Bottom Layer w10: v1(835,450) 932,547 CN.7
PHY_TXN: CN.2 K.5 | length 416.3
  Top Layer w5: K.5 756.4,553.33 756.4,538.22 779.62,515 825,515 1043,297 CN.2
PHY_TXP: CN.1 K.6 | length 515.4
  Top Layer w5: K.6 774.21,550.16 776.93,547.44 827.56,547.44 1025,350 1058.87,350 1155,253.87 CN.1
RedLED: *.A7 D2.1 | length 380.6
  Top Layer w10: *.A7 779.77,1675.02 1146.08,1675.02 D2.1
RJ_45_GND: C57.1 C58.1 CN.4 CN.5 R74.2 | length 444.8
  Bottom Layer w10: CN.4 1060.01,402.01 1110.01,402.01 CN.5 1189,413 R74.2 C57.1 C58.1
RMII_MDC: *.C15 R47.2 | length 307.4
  Top Layer w10: R47.2 87.5,1282 102.5,1297 102.5,1304.5 150,1352 150,1480.52 190.05,1520.57 198.16,1520.57 *.C15@205.73,1528.15
RMII_MDIO: *.C14 R46.2 | length 1334.2
  Top Layer w10: v1(100,1575) 103.79,1575 108.79,1580 *.C14@204.98,1580 ; v1(795,1230) 975,1050 R46.2
  Bottom Layer w10: v1(100,1575) 100,1415 285,1230 v1(795,1230)
SWITCH0: *.A6 B2.1 R3.1 | length 531.7
  Top Layer w10: *.A6 779.77,1627.78 991.72,1627.78 1007.5,1612 R3.1 1030,1597 1068,1597 1156.18,1508.82 1156.18,1466.5 1182.68,1440 B2.1 ; B2.1@1182.68,1452.32 B2.1@1194.29,1452.32
SWITCH1: *.A8 B1.1 R4.1 | length 426.7
  Top Layer w10: *.A8 779.77,1722.27 842.27,1722.27 950,1830 1012,1830 R4.1 1033,1839 1045.36,1839 1046.36,1840 1124.29,1840 B1.1@1142.29,1822
UART_RXD: *.A13 H.2 | length 680.3
  Top Layer w10: *.A13 779.77,1958.49 946.49,1958.49 1108,2120 1270,2120 H.2
UART_TXD: *.A11 H.3 | length 819.4
  Top Layer w10: *.A11 779.77,1864 909,1864 1130,2085 1335,2085 H.3
VDD_1v2: C45.2 C47.2 K.1 | length 366.2
  Top Layer w5: C45.2 534.5,372 552,389.5 552,404.76 675.79,528.55 K.1
  Top Layer w10: C47.2 C45.2
VDDA_3.3: C43.2 C44.2 FL.2 K.2 | length 435.9
  Top Layer w5: v1(695,435) 695.24,435.24 695.24,554.96 K.2
  Bottom Layer w10: v1(695,435) 695,331 C43.2 C44.2 696,120.32 FL.2
X0: C1.1 K.7 XTAL.2 | length 1124.7
  Top Layer w5: K.7@800.2,580.39 K.7 981.91,580.79 1267.11,865.98 XTAL.2@1575,865.98
  Top Layer w10: XTAL.2@1575,865.98 1802.98,865.98 C1.1@1805,868
X1: C2.1 K.8 XTAL.1 | length 1172
  Top Layer w5: K.8 953.51,600.47 1467.05,1114.02 XTAL.1@1575,1114.02 ; C2.1@1737.02,1169.02 C2.1
  Top Layer w10: XTAL.1 1615.98,1150 1723,1150 1737.02,1164.02 C2.1@1737.02,1169.02
pads on no net: *.A2 *.A5 *.A12 *.A14 *.A15 *.A16 *.A17 *.A18 *.B1 *.B2 *.B3 *.B4 *.B5 *.B6 *.B7 *.B8 *.C2 *.C5 *.C6 *.C8 *.C9 *.C10 *.C11 *.C12 *.C13 *.C16 *.C17 *.C18 *.TP1 *.TP2 *.TP3 *.TP4 *.TP5 *.TP6 *.TP7 *.TP8 *.TP9 *.TP10 *.TP11 *.TP12 CN.9 CN.11 CN.12 CN.None CN.P$5 CN.P$6

## Other copper
Top Layer:
  rectangle net GND: 310,1445 685,2145